# EAGLE board attiny_cortana_main (EAGLE 7.7.0)
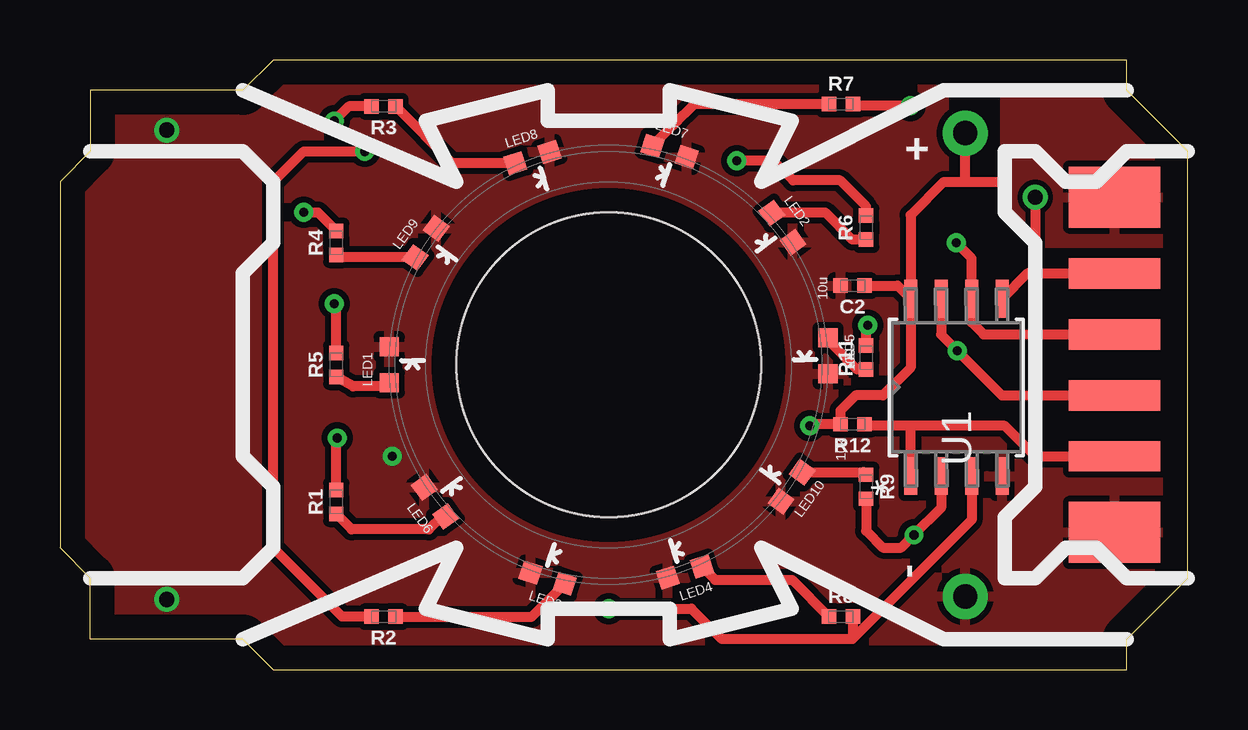
[diagram p0: board, top side]
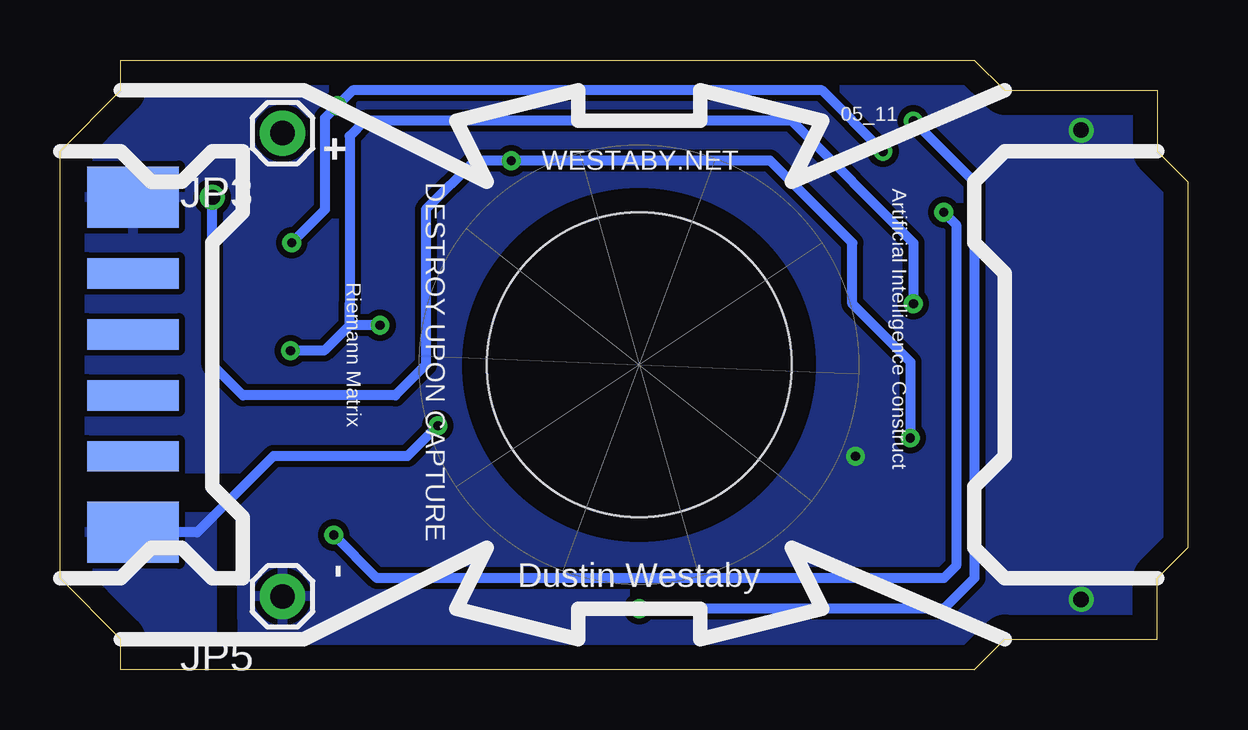
[diagram p1: board, bottom side, seen from below]

Size 46.99 x 25.4 mm. Coordinates in mm from the lower left corner, seen from the top.
Outline: 44.45,0 44.45,1.27 46.99,3.81 46.99,21.59 44.45,24.13 44.45,25.4 8.89,25.4 7.62,24.13 1.27,24.13 1.27,21.59 0,20.32 0,5.08 1.27,3.81 1.27,1.27 7.62,1.27 8.89,0 44.45,0
Copper layers (1*16): Top 0.035mm / dielectric 1.5mm / Bottom 0.035mm
Design rules "default *": minimum track width 10mil, minimum drill 24mil, track to track 8mil, track to pad 8mil, pad to pad 8mil, via to via 8mil, smd to smd 8mil, copper to edge 40mil, drill to drill 8mil, minimum pad ring 10mil, minimum via ring 8mil, stop-mask expansion 4mil, vias tented up to drill 25mil, thermal gap 10mil
Holes 12.7 mm at 22.86,12.7

## Footprints (pad centres in the part's own frame; a part is rotated, then mirrored left to right if it is on the bottom)
0402-TIGHT = smd 0.6 x 0.6: 1 -0.5,0; 2 0.5,0
1X01 = drill 1.016 pad 1.88: 1 0,0
LED-0603 = smd 0.8 x 0.8: A 0,-0.75; C 0,0.75
8S2_ATM = smd 1.575 x 0.533: 1 -3.696,1.905; 2 -3.696,0.635; 3 -3.696,-0.635; 4 -3.696,-1.905; 5 3.696,-1.905; 6 3.696,-0.635; 7 3.696,0.635; 8 3.696,1.905
CRT_CON = smd 3.81 x 2.54 bottom: B1 0,6.985; B6 0,-6.985 | smd 3.81 x 1.27 bottom: B2 0,3.81; B3 0,1.27; B4 0,-1.27; B5 0,-3.81 | smd 3.81 x 2.54: T1 0,6.985; T6 0,-6.985 | smd 3.81 x 1.27: T2 0,3.81; T3 0,1.27; T4 0,-1.27; T5 0,-3.81

## Placement (x,y rotation side)
C2  0.1uF  [0402-TIGHT]  33.02,16 180 top
JP3  M01PTH  [1X01]  37.72,22.35 180 bottom
JP5  M01PTH  [1X01]  37.72,3.05 180 bottom
LED1  [LED-0603]  13.72,12.7 0 top
LED2  [LED-0603]  30.1,18.41 216 top
LED3  [LED-0603]  20.32,3.81 72 top
LED4  [LED-0603]  26.04,4.06 108 top
LED5  [LED-0603]  32,13.08 180 top
LED6  [LED-0603]  15.62,6.99 36 top
LED7  [LED-0603]  25.4,21.59 252 top
LED8  [LED-0603]  19.68,21.34 288 top
LED9  [LED-0603]  15.24,17.78 324 top
LED10  [LED-0603]  30.48,7.62 144 top
R1  100  [0402-TIGHT]  11.51,6.99 90 top
R2  100  [0402-TIGHT]  13.48,2.21 180 top
R3  100  [0402-TIGHT]  13.48,23.47 180 top
R4  100  [0402-TIGHT]  11.51,17.78 90 top
R5  100  [0402-TIGHT]  11.51,12.7 90 top
R6  100  [0402-TIGHT]  33.59,18.41 90 top
R7  100  [0402-TIGHT]  32.54,23.56 0 top
R8  100  [0402-TIGHT]  32.54,2.21 0 top
R9  100  [0402-TIGHT]  33.59,7.62 270 top
R11  100  [0402-TIGHT]  33.59,13 90 top
R12  10k  [0402-TIGHT]  33.02,10.22 180 top
U1  ATTINY45-20SU  [8S2_ATM]  37.35,11.76 90 top
U$5  M6X2  [CRT_CON]  43.94,12.7 0 top

## Library data of the parts
C2 = SparkFun-Capacitors; PROD_ID: CAP-12416
JP3 JP5 LED1-LED10 = SparkFun
R1-R9 R11 R12 = SparkFun-Resistors; PROD_ID: RES-14241
U1 = attinyx5_tssop8; COPYRIGHT: Copyright (C) 2021 Ultra Librarian. All rights reserved.; DIGI-KEY_PART_NUMBER_1: ATCC-1252-ND; DIGI-KEY_PART_NUMBER_2: ATTINY45-20SU-ND; DIGI-KEY_PART_NUMBER_3: 2156-ATTINY45-20SU-ND; DIGI-KEY_PART_NUMBER_4: MCC-3845-ND; MANUFACTURER_PART_NUMBER: ATTINY45-20SU; MFR_NAME: Microchip
U$5 = dustin_01_2011

## Nets
GND: C2.2 JP5.1 LED1.C LED2.C LED3.C LED4.C LED5.C LED6.C LED7.C LED8.C LED9.C LED10.C U1.4 U$5.B1 U$5.T6
L4: R3.2 R8.2 U1.3
L5: R4.2 R9.2 U1.2
MISO_L3: R2.2 R7.2 U1.6 U$5.T3
MOSI_L2: R1.2 R6.2 U1.5 U$5.T2
N$1: LED3.A R2.1
N$2: LED4.A R8.1
N$3: LED1.A R5.1
N$4: LED6.A R1.1
N$5: LED2.A R6.1
N$6: LED5.A R11.1
N$7: LED7.A R7.1
N$8: LED8.A R3.1
N$9: LED9.A R4.1
N$10: LED10.A R9.1
RST: R12.1 U1.1 U$5.T5
SCK_L1: R5.2 R11.2 U1.7 U$5.T4
VCC: C2.1 JP3.1 R12.2 U1.8 U$5.B6 U$5.T1

## Tracks (layer width: path | path; a pad name or v marks a point on that pad's centre or on a via)
GND  (via drill 0.38, 0.64)
  other vias: 4.45,22.48 4.45,2.92 13.84,8.89
  pour Bottom (isolate 0.254): 0,0 0,25.4 46.99,25.4 47.12,8.38 39.5,8.38 39.37,0
  pour Top (isolate 0.254): 0,0 0,25.4 36.83,25.4 36.83,16.51 46.99,16.51 46.99,0
L4  (via drill 0.38)
  Top 0.406: U1.3 37.98,6.24 33.04,1.29 | R3.2 12.04,23.47 v11.43,22.86 | v22.86,2.54 26.31,2.54 27.58,1.27 33.02,1.27 33.04,1.29 | R8.2 33.04,1.29
  Bottom 0.406: v11.43,22.86 8.89,20.32 8.89,3.81 10.16,2.54 v22.86,2.54
L5  (via drill 0.38)
  Top 0.406: U1.2 36.72,6.74 v35.58,5.61 35.05,5.08 34.29,5.08 33.59,5.78 R9.2 | v10.16,19.05 10.74,19.05 R4.2
  Bottom 0.406: v35.58,5.61 33.78,3.81 10.16,3.81 9.65,4.32 9.65,18.54 v10.16,19.05
MISO_L3  (via drill 0.38)
  Top 0.406: U$5.T3 38.48,13.97 37.98,14.47 U1.6 37.98,17.13 v37.34,17.78 | v35.43,23.5 33.1,23.5 R7.2 | R2.2 11.76,2.21 8.89,5.08 8.89,20.32 10.16,21.59 v12.7,21.59
  Bottom 0.406: v37.34,17.78 35.94,19.18 35.94,22.99 v35.43,23.5 34.8,24.13 15.24,24.13 v12.7,21.59
MOSI_L2  (via drill 0.38, 0.64)
  Top 0.406: 40.64,16.51 U$5.T2 | v40.64,19.68 40.64,16.51 | 40.64,16.51 40.31,16.51 U1.5 | v28.19,21.21 29.72,21.21 30.54,20.38 32.51,20.38 33.59,19.3 R6.2 | R1.2 11.51,9.61 v11.56,9.65
  Bottom 0.406: v40.64,19.68 40.64,12.7 39.37,11.43 33.02,11.43 31.75,12.7 31.75,19.18 29.72,21.21 v28.19,21.21 17.4,21.21 13.97,17.78 13.97,15.24 11.56,12.83 v11.56,9.65
N$1
  Top 0.406: LED3.A 20.5,3.05 19.66,2.21 R2.1
N$2
  Top 0.406: LED4.A 27.3,3.74 30.51,3.74 R8.1
N$3
  Top 0.406: LED1.A 13.57,11.8 12.21,11.8 R5.1
N$4
  Top 0.406: LED6.A 15.9,6.38 15.37,5.84 12.15,5.84 R1.1
N$5
  Top 0.406: LED2.A 29.69,19.05 31.88,19.05 33.01,17.91 R6.1
N$6
  Top 0.406: 32.14,13.97 LED5.A 32,13.72 33.22,12.5 R11.1
N$7
  Top 0.406: LED7.A 25.56,22.7 | 25.56,22.7 25.73,22.86 | R7.1 26.43,23.56 25.56,22.7
N$8
  Top 0.406: LED8.A 16.34,21.1 R3.1
N$9
  Top 0.406: LED9.A 11.62,17.17 R4.1
N$10
  Top 0.406: LED10.A 33.48,8.23 R9.1
RST
  Top 0.406: U$5.T5 40.64,8.89 39.37,10.16 35.56,10.16 | 35.56,10.16 33.59,10.16 R12.1 | U1.1 35.45,10.04 35.56,10.16
SCK_L1  (via drill 0.38)
  Top 0.406: U$5.T4 39.24,11.43 v37.38,13.29 | v37.38,13.29 37.51,13.41 | U1.7 36.72,13.96 v37.38,13.29 | R5.2 11.51,15.16 v11.43,15.24 | R11.2 33.59,14.29 v33.66,14.35
  Bottom 0.406: v37.38,13.29 35.99,13.29 34.92,14.35 | v11.43,15.24 11.43,17.78 16.51,22.86 34.29,22.86 34.92,22.23 34.92,15.24 34.92,14.35 | v33.66,14.35 34.92,14.35
VCC  (via drill 0.38)
  Top 0.406: 43.81,20.32 43.81,19.18 U$5.T1 | 37.59,20.32 36.83,20.32 35.45,18.93 U1.8 | 37.59,20.32 39.37,20.32 | JP3.1 37.72,20.45 37.59,20.32 | U1.8 35.45,12.59 34.29,11.43 33.15,11.43 32.52,10.8 R12.2 31.31,10.22 v31.24,10.16 | C2.1 34.9,16 U1.8
  Bottom 0.406: U$5.B6 41.27,5.71 38.1,8.89 32.51,8.89 v31.24,10.16
  pour Top: 46.99,17.78 46.99,21.59 44.45,24.13 39.37,24.13 39.37,19.05 40.64,17.78
  pour Bottom: 40.64,6.35 46.99,6.35 46.99,3.81 44.45,1.27 44.45,0 40.64,0

## Text on the board
tPlace: + | 10u | 100 | 10k | -
bPlace: 05_11 | WESTABY.NET | + | Artificial Intelligence Construct | DESTROY UPON CAPTURE | Riemann Matrix | - | Dustin Westaby
bStop: O I S R